# Altium PCB panel_board_PCB.PcbDoc
Units mm, origin at the board's own origin, x right, y up, seen from the top; angles counter-clockwise.
Board outline 90 x 45 mm, 2 copper layers (Top Layer, Bottom Layer); 27 components, 18 nets, 108 pads, 7 vias.
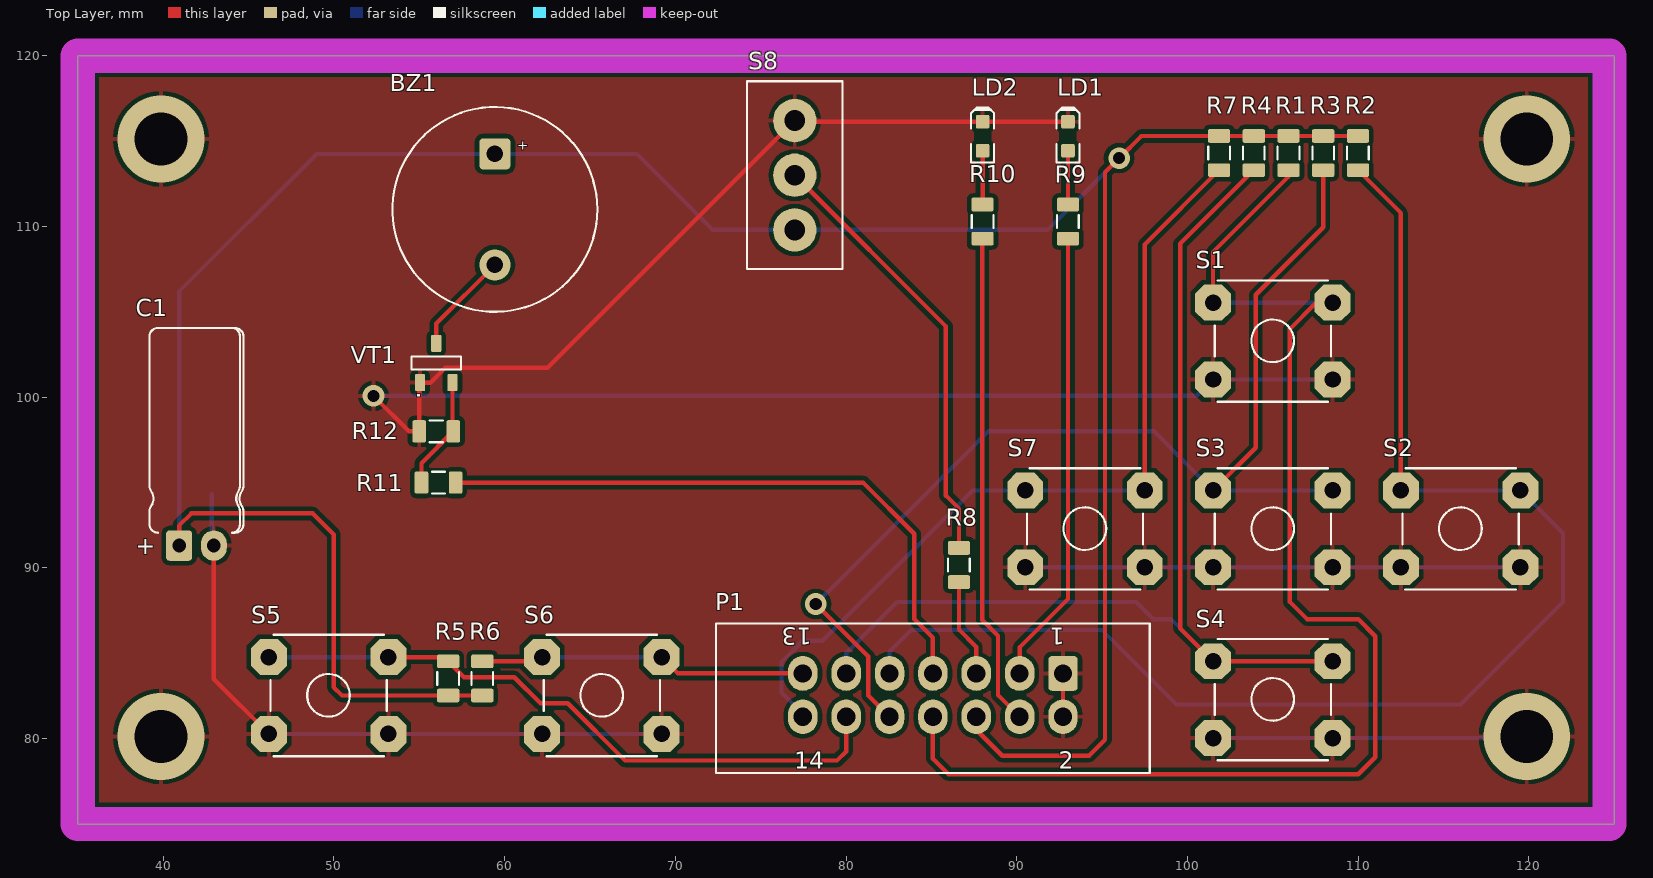
[diagram p0: Top Layer view]
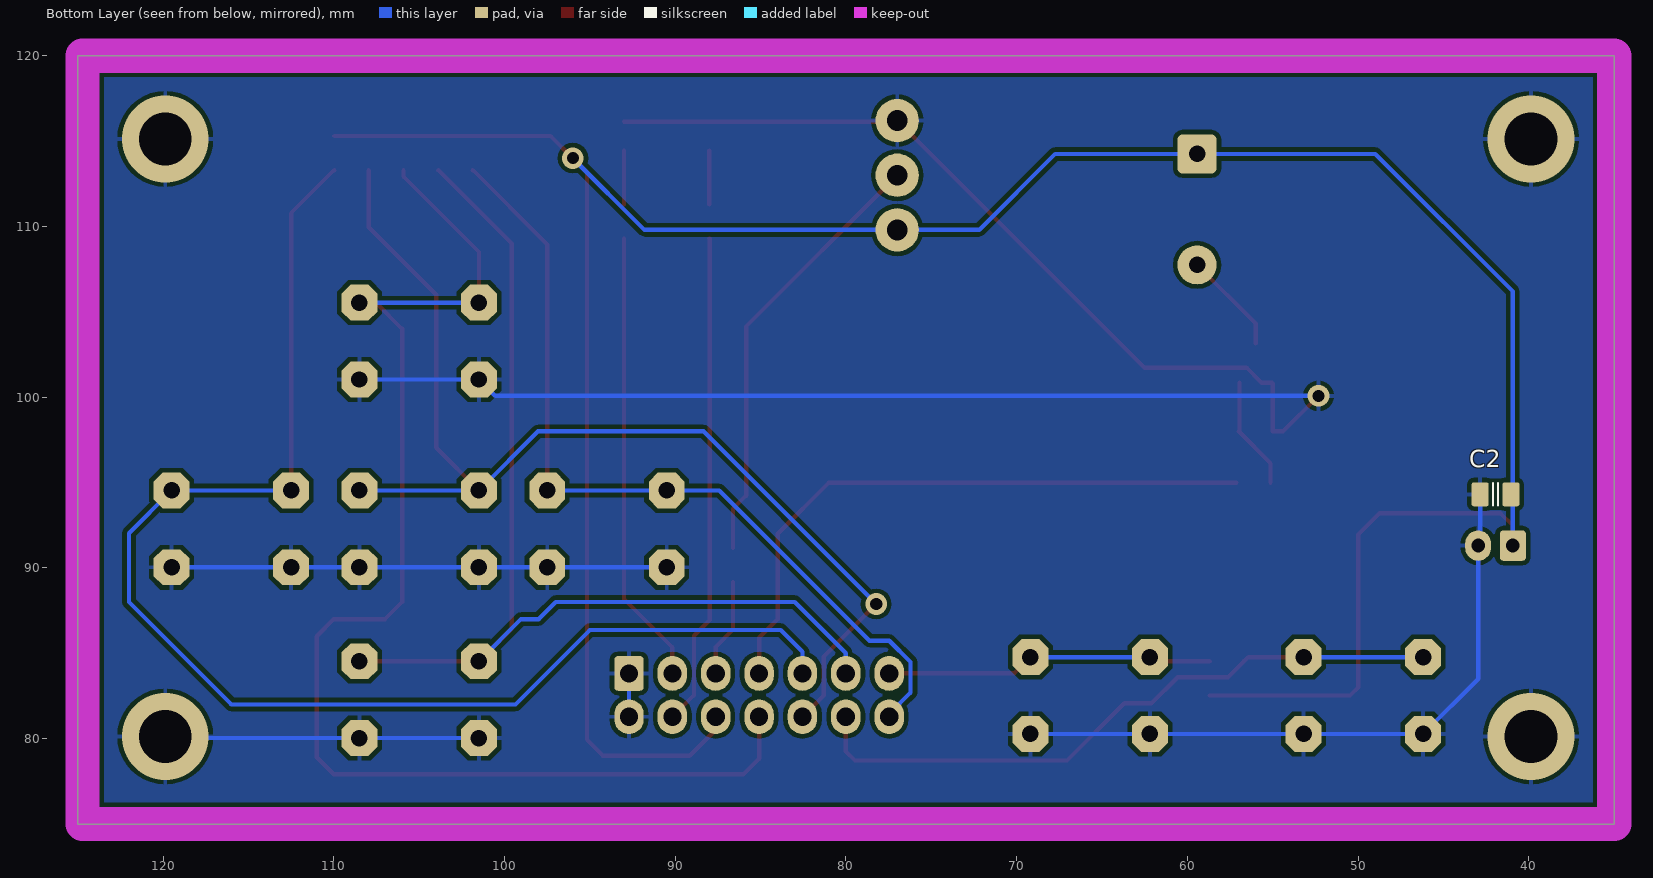
[diagram p1: Bottom Layer view, seen from below]
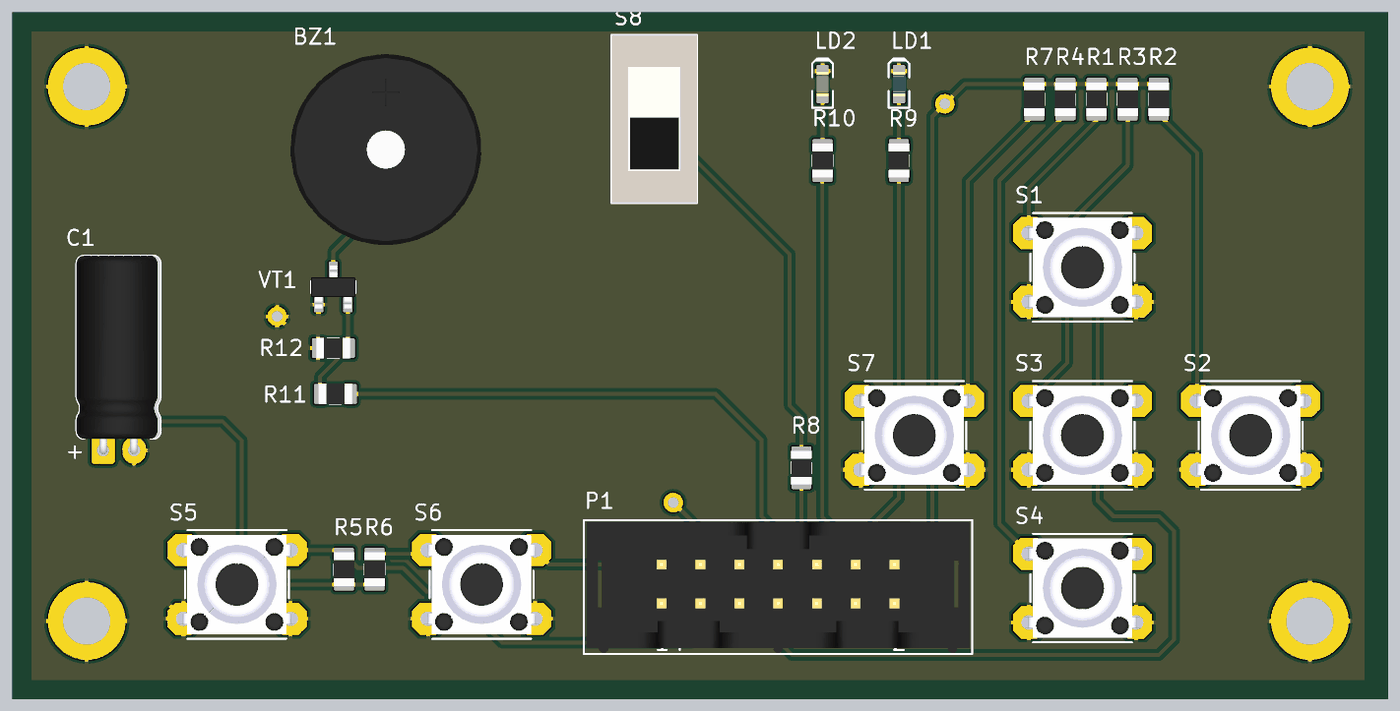
[diagram p2: 3D render of the assembled board from above, using the file's embedded part models]

## Layer stack, top to bottom
Top Solder: solder mask 0.0102, Solder Resist, Dk 3.5
Top Layer: signal copper 0.0356
Dielectric1: dielectric 0.32, FR-4, Dk 4.8
Bottom Layer: signal copper 0.0356
Bottom Solder: solder mask 0.0102, Solder Resist, Dk 3.5

## Board outline
35,75 35,120 125,120 125,75

## Design rules (kind name [scope] priority, off if disabled: settings)
Clearance [All] p1: gap=0.254
PolygonConnect [All] p1: connectstyle=Relief reliefconductorwidth=0.254 reliefentries=4 polygonreliefangle="90 Angle" airgapwidth=0.254
RoutingVias [All] p1: holewidth=0.711 width=1.27 viastyle="Through Hole" minholewidth=0.711 minwidth=1.27 maxholewidth=0.711 maxwidth=1.27
SilkToSolderMaskClearance SilkscreenOverComponentPads [IsPad] p1: minsilkscreentomaskgap=0.254 clearancetoexposedcopper=TRUE
SolderMaskExpansion [All] p1: expansion=0.102
Width [All] p1: maxlimit=0.254 minlimit=0.254 preferedwidth=0.254
29 further rules are at their usual default settings.

## Components (designator, comment, footprint, x,y, rotation, side; value= is the part's Value field where it differs from the comment)
BZ1 "Alternate part: 3100-932" BUZZER_12.0X8.5MM 59.436,110.998 r270 top
C1 "Cap Pol1" CAPAE200P550X1200_FLAT1 41.956,91.308 r0 top
C2 "C0805" CAPC2012X135N 41.956,94.308 r180 bottom
LD1 "PWR_L" LED-0603-BLUE 93,115.286 r90 top
LD2 "PWR_H" LED-0603-GREEN 88,115.286 r90 top
P1 "PANEL" 14P_PCB_HEADER_BRD_MNT 85.09,82.55 r270 top
R1 "Res2" RESC2012X70N 105.918,114.3 r270 top
R2 "Res2" RESC2012X70N 109.982,114.3 r270 top
R3 "Res2" RESC2012X70N 107.95,114.3 r270 top
R4 "Res2" RESC2012X70N 103.886,114.3 r270 top
R5 "Res2" RESC2012X70N 56.698,83.524 r90 top
R6 "Res2" RESC2012X70N 58.698,83.524 r90 top
R7 "Res2" RESC2012X70N 101.854,114.3 r270 top
R8 "Res2" RESC2012X70N 86.614,90.17 r270 top
R9 "Res2" RESC2012X70N 93,110.286 r270 top
R10 "Res2" RESC2012X70N 88,110.286 r270 top
R11 "Res2" RESC2012X70N 56.134,94.996 r180 top
R12 "Res2" RESC2012X70N 56,98 r0 top
S1 "SW_THT_PB_7.0mm" TACT-SWITCH-TS1170 105,103.286 r0 top
S2 "SW_THT_PB_7.0mm" TACT-SWITCH-TS1170 116,92.286 r0 top
S3 "SW_THT_PB_7.0mm" TACT-SWITCH-TS1170 105,92.286 r0 top
S4 "SW_THT_PB_7.0mm" TACT-SWITCH-TS1170 105,82.286 r0 top
S5 "SW_THT_PB_7.0mm" TACT-SWITCH-TS1170 49.698,82.524 r0 top
S6 "SW_THT_PB_7.0mm" TACT-SWITCH-TS1170 65.698,82.524 r0 top
S7 "SW_THT_PB_7.0mm" TACT-SWITCH-TS1170 94,92.286 r0 top
S8 "ON-ON" SWITCH_SPDT_SLIDER 77,113 r90 top
VT1 "BC817" SOT23-3 56,102 r90 top

## Footprints (in the part's own frame and the unit in brackets; to place one, negate y for a bottom-side part, rotate by r counter-clockwise, add the part's x,y. Pads: shape width x height; smd on the part's side, far side on the other; paste and mask are expansions set on the pad)
14P_PCB_HEADER_BRD_MNT [mil] "HEADER BRD MNT 14POS 2.54MM"
  round 40 on Mech15: 0(0,0)
  rrect25% 80x68 hole 42: 1(-50,300)
  oval 80x68 hole 42: 2(50,300) 3(-50,200) 4(50,200) 5(-50,100) 6(50,100) 7(-50,0) 8(50,0) 9(-50,-100) 10(50,-100) 11(-50,-200) 12(50,-200) 13(-50,-300) 14(50,-300)
  silkscreen extent -165,-500 180,500, body extent -162,-494 178,494, height 390
BUZZER_12.0X8.5MM [mil]
  round 20 on Mech15: 0(0,0)
  rrect25% 72x72 / inner rrect25% 72x72 / far side rrect25% 90x90 hole 38: 1(-127.95,0)
  round 72 / inner round 72 / far side round 90 hole 38: 2(127.95,0)
  silkscreen extent -236,-236 236,236, body extent -246,-246 246,246, height 354
CAPAE200P550X1200_FLAT1 [mil]
  round 20 on Mech15: 0(0,0)
  rrect25% 60x70 hole 31.5: 1(-40,0)
  oval 60x70 hole 31.5: 2(40,0)
  silkscreen extent -108,30 108,502, body extent -107,-10 107,502, height 216
CAPC2012X135N [mm] "Chip Capacitor, Body 2.0x1.2mm, EIA 0805, IPC Medium Density"
  round 0.254 on Mech15: 0(0,0)
  rrect25% 1x1.4 smd: 1(-0.9,0) 2(0.9,0)
  Top Layer pour cut-out: -0.675,0.7 -0.475,0.9 0.475,0.9 0.675,0.7 0.675,-0.7 0.475,-0.9 -0.475,-0.9 -0.675,-0.7
  silkscreen extent -0.15,-0.65 0.15,0.65, body extent -1.1,-0.72 1.1,0.73, height 1.34
LED-0603-BLUE [mm]
  round 0.254 on Mech15: 0(0,0)
  rrect25% 0.8x0.8 smd: A(-0.85,0) K(0.85,0)
  Top Layer pour cut-out: -0.5,0.5 0.5,0.5 0.5,-0.5 -0.5,-0.5
  silkscreen extent -1.55,-0.67 1.68,0.68, body extent -0.8,-0.4 0.8,0.4, height 0.75
LED-0603-GREEN [mm]
  round 0.254 on Mech15: 0(0,0)
  rrect25% 0.8x0.8 smd: A(-0.85,0) K(0.85,0)
  Top Layer pour cut-out: -0.5,0.5 0.5,0.5 0.5,-0.5 -0.5,-0.5
  silkscreen extent -1.55,-0.68 1.68,0.68, body extent -0.8,-0.4 0.8,0.4, height 0.75
RESC2012X70N [mm] "Chip Resistor, Body 2.0x1.2mm, EIA 0805, IPC Medium Density"
  round 0.254 on Mech15: 0(0,0)
  rrect25% 0.8x1.3 smd: 1(-1,0) 2(1,0)
  Top Layer pour cut-out: -0.725,0.65 -0.525,0.85 0.525,0.85 0.725,0.65 0.725,-0.65 0.525,-0.85 -0.525,-0.85 -0.725,-0.65
  silkscreen extent -0.38,-0.64 0.38,0.64, body extent -1.1,-0.67 1.1,0.68, height 0.69
SOT23-3 [mm] "SOT23, 3 pin"
  round 0.5 on Mech15: 0(0,0)
  rrect25% 1x0.6 smd: 1(-1.15,0.95) 2(-1.15,-0.95) 3(1.15,0)
  silkscreen extent -0.38,-1.45 0.38,1.45, body extent -1.4,-1.45 1.4,1.45, height 1.29
SWITCH_SPDT_SLIDER [mil] "TE Connectivity SLS121PC04 SPDT slider"
  round 100 hole 48: 1(-126,0) 2(0,0) 3(126,0)
  silkscreen extent -217,-110 217,110, body extent -216,-110 217,110, height 394
TACT-SWITCH-TS1170 [mm] "Bondtact sealed TH tact switch"
  round 0.508 on Mech15: 0(0,0)
  oct 2.1x2.1 hole 0.965: 1(-3.5,-2.25) 1(3.5,-2.25) 2(-3.5,2.25) 2(3.5,2.25)
  silkscreen extent -3.4,-3.56 3.4,3.56, body extent -4.13,-3.25 4.13,3.25, height 7

## Part data
BZ1: library part BZ_12x8.5x6.5_2kHz, "Speaker, Magnetic Transducer"
C1: "Polarized Capacitor (Radial)"
C2: "Ceramic Chip Capacitor - Standard"
LD1 LD2: library part LED, "APT1608QBC/D"
P1: library part "Header 14", "Header, 14-Pin"
R1 R2 R3 R4 R5 R6 R7 R8 R9 R10 R11 R12: "Resistor"
S1 S2 S3 S4 S5 S6 S7: "Switch, tact, 7.0mm stem"
S8: library part SW_THD_SPDT_On-On, "Switch THD vertical toggle SPDT"
VT1: library part QNPN, "NPN Bipolar Transistor"

## Via types
v1: diameter 5.08, hole 3.1, Top Layer to Bottom Layer, 4 vias
v2: diameter 1.27, hole 0.711, Top Layer to Bottom Layer, 3 vias

## Nets (pads, with @x,y where several pads share a name; then routed paths per layer and width w, separated by ;. In a path a pad name is that pad's centre, name@x,y a point inside that pad or via, vN(x,y) a via of type N, cw(c..) or ccw(c..) an arc to the next point about the centre after c; other vN are vias at no path point)
BPR: P1.7 R11.1 | length 36.7
  Top Layer w0.254: R11.1 81.004,94.996 84,92 84,87 85.09,85.91 P1.7
BUT1: P1.8 R1.2 S1.2 | length 77.8
  Top Layer w0.254: P1.8 85.09,78.82 86,77.91 110,77.91 111,78.91 111,86 110,87 107,87 106,88 106,104 107.536,105.536 S1.2@108.5,105.536 ; S1.2@101.5,105.536 101.5,108.5 105.918,112.918 R1.2
  Bottom Layer w0.254: S1.2@101.5,105.536 S1.2@108.5,105.536
BUT2: P1.9 R2.2 S2.2 | length 79.9
  Top Layer w0.254: R2.2 112.5,110.782 S2.2@112.5,94.536
  Bottom Layer w0.254: P1.9 82.55,85.09 83.82,86.36 95,86.36 99.36,82 116,82 122,88 122,92.036 119.5,94.536 S2.2@112.5,94.536
BUT3: P1.10 R3.2 S3.2 | length 65.7
  Top Layer w0.254: v2(78.232,87.884) 81.305,84.811 81.305,82.525 P1.10 ; S3.2@101.5,94.536 104,97.036 104,106 107.95,109.95 R3.2
  Bottom Layer w0.254: v2(78.232,87.884) 88.348,98 98.036,98 101.5,94.536 S3.2@108.5,94.536
BUT4: P1.11 R4.2 S4.2 | length 63.7
  Top Layer w0.254: R4.2 99.568,108.982 99.568,86.468 101.5,84.536 S4.2@108.5,84.536
  Bottom Layer w0.254: P1.11 80.01,85.01 83,88 97,88 98,87 99.036,87 S4.2@101.5,84.536
BUT5: P1.12 R5.2 S5.2 | length 38.6
  Top Layer w0.254: S5.2@53.198,84.774 56.448,84.774 R5.2 57.623,83.599 60.571,83.599 62.103,82.067 63.703,82.067 67.056,78.715 79.477,78.715 80.01,79.248 P1.12
  Bottom Layer w0.254: S5.2@46.198,84.774 S5.2@53.198,84.774
BUT6: P1.13 R6.2 S6.2 | length 19.3
  Top Layer w0.254: R6.2 61.948,84.524 S6.2@62.198,84.774 ; S6.2@69.198,84.774 70.152,83.82 P1.13
  Bottom Layer w0.254: S6.2@62.198,84.774 S6.2@69.198,84.774
BUT7: P1.14 R7.2 S7.2 | length 49.7
  Top Layer w0.254: S7.2@97.5,94.536 97.5,108.946 R7.2
  Bottom Layer w0.254: P1.14 77.47,81.45 76.225,82.695 76.225,84.488 77.47,85.733 78.621,85.733 87.424,94.536 90.5,94.536 S7.2@97.5,94.536
GND: C1.2 C2.1 LD1.K LD2.K P1.1 P1.2 R12.1 S1.1 S2.1 S3.1 S4.1 S5.1 S6.1 S7.1 S8.3 VT1.1 | length 210.8
  Top Layer w0.254: C1.2 42.972,83.5 S5.1@46.198,80.274 ; v2(52.324,100.076) 54.4,98 R12.1 55,100.8 VT1.1 55.655,100.85 56.536,101.731 62.531,101.731 S8.3 77.064,116.136 LD2.K LD1.K ; S7.1@90.5,90.036 S7.1@90.678,90.036 ; P1.2 P1.1
  Bottom Layer w0.254: C2.1 42.856,91.424 C1.2 42.972,83.5 46.198,80.274 53.198,80.274 62.198,80.274 S6.1@69.198,80.274 ; v2(52.324,100.076) 100.54,100.076 101.5,101.036 S1.1@108.5,101.036 ; S7.1@90.5,90.036 97.5,90.036 101.5,90.036 108.5,90.036 112.5,90.036 S2.1@119.5,90.036 ; P1.2 P1.1 ; S4.1@101.5,80.036 108.5,80.036 119.782,80.036 v1(119.873,80.127)
  other v1: 39.873,80.127 39.873,115.127 119.873,115.127
LD1: P1.3 R9.2 | length 26.6
  Top Layer w0.254: P1.3 90.17,85.344 93,88.174 R9.2
LD2: P1.4 R10.2 | length 28.9
  Top Layer w0.254: R10.2 87.986,109.286 87.986,86.944 88.9,86.03 88.9,82.55 P1.4
LD3: P1.5 R8.2 | length 5.8
  Top Layer w0.254: R8.2 86.614,86.386 87.63,85.37 P1.5
NetBZ1_2: BZ1.2 VT1.3 | length 6
  Top Layer w0.254: VT1.3 56,104.312 BZ1.2
NetLD1_A: LD1.A R9.1 | length 3.2
  Top Layer w0.254: R9.1 LD1.A
NetLD2_A: LD2.A R10.1 | length 3.2
  Top Layer w0.254: R10.1 LD2.A
NetR8_1: R8.1 S8.2 | length 25.8
  Top Layer w0.254: S8.2 85.852,104.148 85.852,94.234 86.614,93.472 R8.1
NetR11_2: R11.2 R12.2 VT1.2 | length 6.6
  Top Layer w0.254: R11.2 55.134,96.134 R12.2 56.95,98.05 VT1.2
VCC: BZ1.1 C1.1 C2.2 P1.6 R1.1 R2.1 R3.1 R4.1 R5.1 R6.1 R7.1 S8.1 | length 164
  Top Layer w0.254: C1.1 40.94,92.477 41.656,93.193 48.768,93.193 50,91.961 50,83 50.476,82.524 R5.1 R6.1 ; P1.6 87.63,80.518 89.148,79 94.24,79 95.174,79.934 95.174,113.174 v2(96,114) 97.3,115.3 R7.1 R4.1 R1.1 R3.1 R2.1
  Bottom Layer w0.254: C1.1 40.94,106.188 49,114.248 BZ1.1 67.752,114.248 72.2,109.8 S8.1 91.8,109.8 v2(96,114)
pads on no net: BZ1.0 C1.0 C2.0 LD1.0 LD2.0 P1.0 R1.0 R2.0 R3.0 R4.0 R5.0 R6.0 R7.0 R8.0 R9.0 R10.0 R11.0 R12.0 S1.0 S2.0 S3.0 S4.0 S5.0 S6.0 S7.0 VT1.0

## Polygon pours and split planes (outlines as drawn)
GND on Top Layer "Top Layer-No Net 1" (solid, pour order 5): 35.046,119.894 35.046,74.894 124.76,74.894 124.76,119.894
GND on Bottom Layer "Top Layer-No Net 1" (solid, remove dead copper, pour order 4): 35.355,120.057 35.355,75.057 125.069,75.057 125.069,120.057

## Keep-outs
Keep-Out Layer:
  lines w2: 35,75 35,120 124.714,120 124.714,75 35,75

## Text inside footprints (layer, text, board x,y; h text height)
BZ1: Top Overlay "+" at 60.736,114.298 h1
C1: Top Overlay "+" at 38.4,90.8 h1
P1: Top Overlay "13" at 78.003,86.487 h1 r180; Top Overlay "14" at 76.955,78.232 h1; Top Overlay "1" at 92.801,86.487 h1 r180; Top Overlay "2" at 92.456,78.232 h1